# Altium PCB UTOS V1.0.PcbDoc
Units mil, origin at the board's own origin, x right, y up, seen from the top; angles counter-clockwise.
Board outline 1098.1 x 590.55 mil, 2 copper layers (Top Layer, Bottom Layer); 26 components, 29 nets, 113 pads, 34 vias.
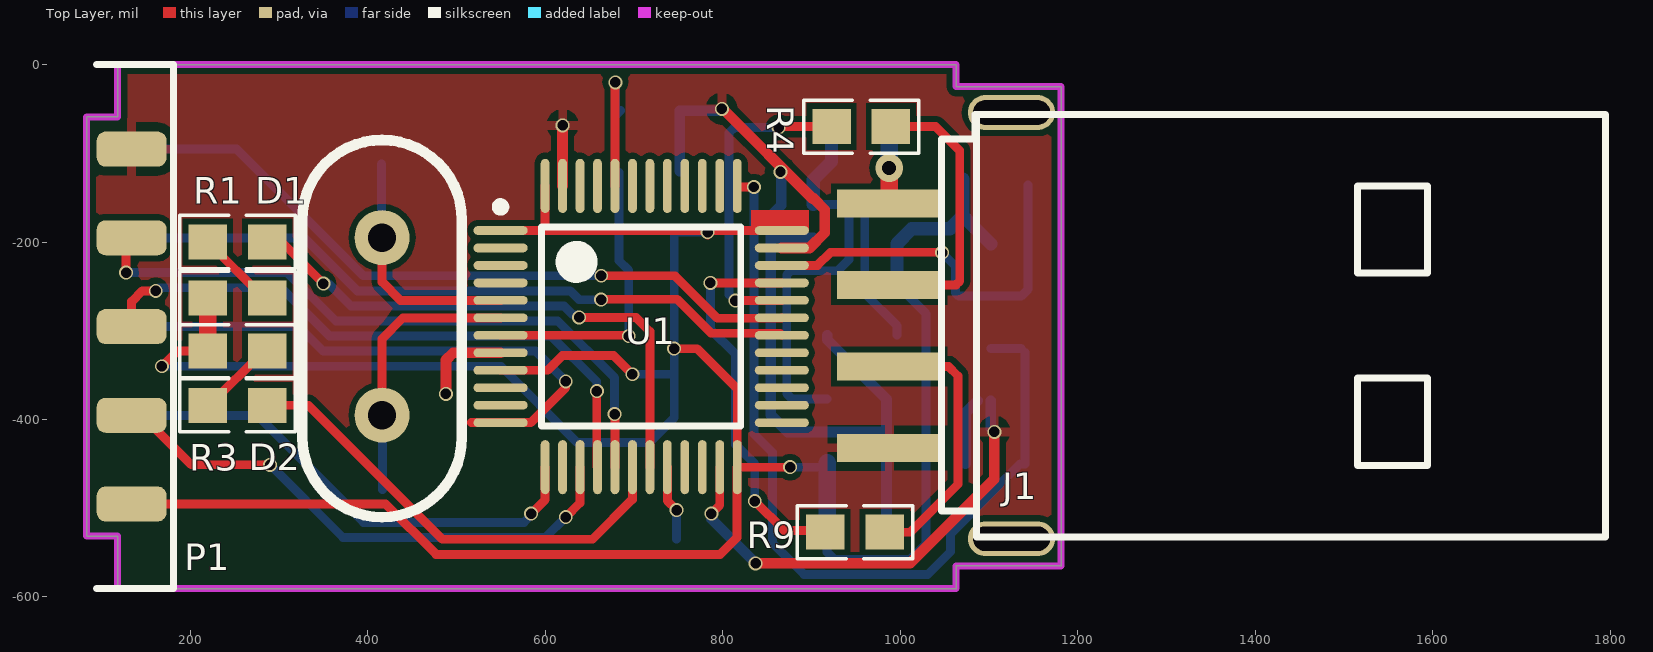
[diagram p0: Top Layer view]
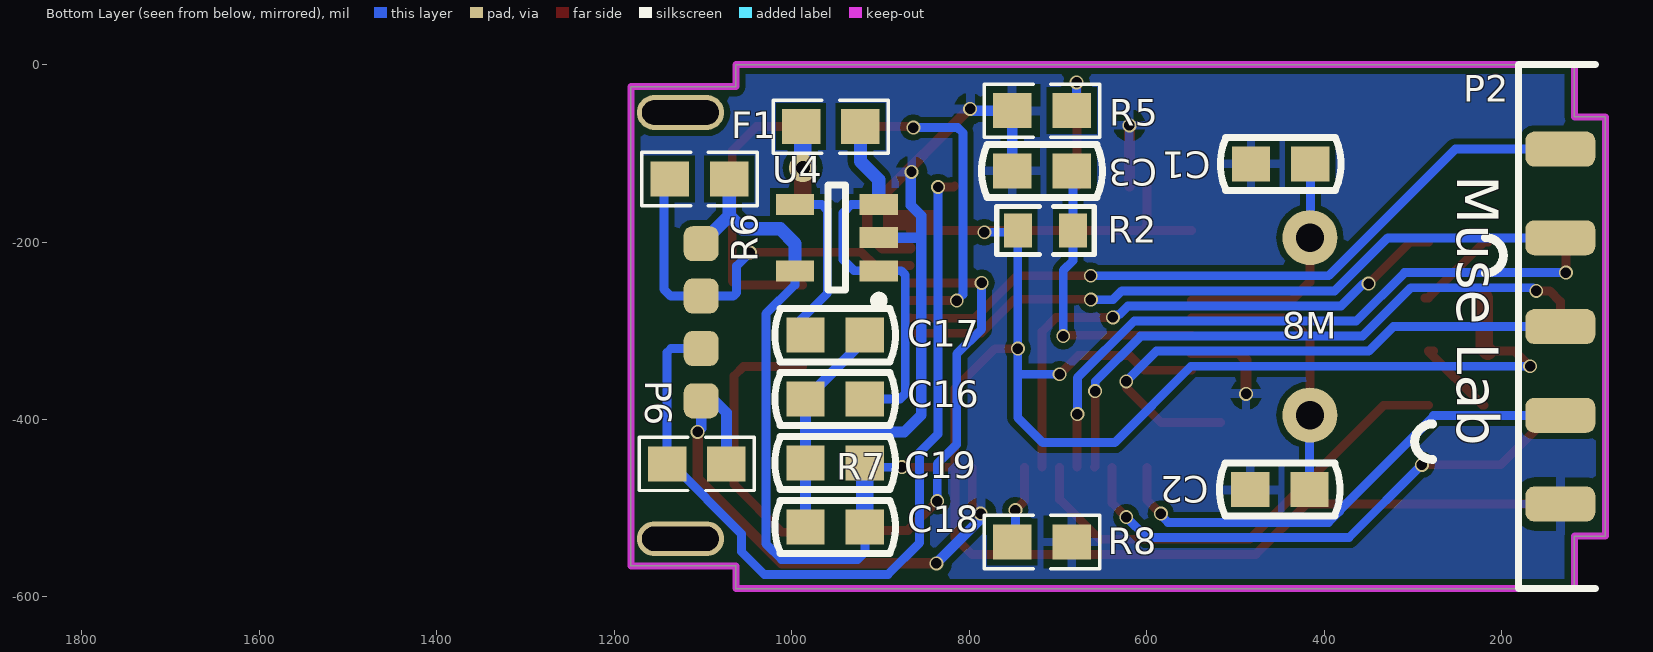
[diagram p1: Bottom Layer view, seen from below]

## Layer stack, top to bottom
Top Solder: solder mask 0.4, Solder Resist, Dk 3.5
Top Layer: signal copper 1.4
Dielectric 1: dielectric 12.6, FR-4, Dk 4.8
Bottom Layer: signal copper 1.4
Bottom Solder: solder mask 0.4, Solder Resist, Dk 3.5

## Board outline
83,-531.5 118.11,-531.5 118.11,-590.55 1062.99,-590.55 1062.99,-565 1181.1,-565 1181.1,-25 1062.99,-25 1062.99,0 118.11,0 118.11,-59.06 83,-59.06

## Design rules (kind name [scope] priority, off if disabled: settings)
Clearance [All] p1: gap=7
ComponentClearance [All] p1: gap=0 collisioncheckmode=3 verticalgap=0 showdistances=FALSE
PolygonConnect [All] p1: connectstyle=Relief reliefconductorwidth=10 reliefentries=4 polygonreliefangle="90 Angle" airgapwidth=10
RoutingVias [All] p1: holewidth=11.81 width=15.75 viastyle="Through Hole" minholewidth=7.87 minwidth=11.81 maxholewidth=11.81 maxwidth=15.75
SilkToBoardRegionClearance [All] p1 off:
SolderMaskExpansion [All] p1: expansion=4
Width GND [InNet('GND')] p1: maxlimit=20 minlimit=10 preferedwidth=12
Width 3V3 [InNet('3V3')] p2: maxlimit=20 minlimit=10 preferedwidth=15
Width 5V [InNet('5V')] p3: maxlimit=20 minlimit=10 preferedwidth=15
Width [All] p4: maxlimit=40 minlimit=6 preferedwidth=6
27 further rules are at their usual default settings.

## Components (designator, comment, footprint, x,y, rotation, side; value= is the part's Value field where it differs from the comment)
8M "XTAL" XTAL 416,-195 r180 bottom
C1 "C0603" C-RAD-0603 449,-112 r0 bottom
C2 "C0603" C-RAD-0603 450,-479 r0 bottom
C3 "C0603" C-RAD-0603 718,-120 r180 bottom
C16 "1uf" C-RAD-0603 951,-377 r180 bottom
C17 "223" C-RAD-0603 951,-305 r0 bottom
C18 "1uf" C-RAD-0603 951,-521 r180 bottom
C19 "104" C-RAD-0603 951,-449 r180 bottom
D1 "D0603" 0603-1 253,-263 r0 top
D2 "D0603" 0603-1 253,-323 r0 top
F1 "FUSE" 0603-1 956,-70 r0 bottom
J1 "USB" USB 1145,-558 r0 top locked
P1 "" p5 94.49,-295.28 r180 top
P2 "" p5 94.49,-295.28 r180 bottom
P6 "Header 4" p4 1102,-379 r270 bottom
R1 "R0603" 0603-1 253,-200 r180 top
R2 "R0603" r0603 683,-187 r0 bottom
R3 "R0603" 0603-1 253,-384 r180 top
R4 "R0805" 0603-1 956,-70 r0 top
R5 "R0603" 0603-1 718,-52 r0 bottom
R6 "R0805" 0603-1 1104,-129 r0 bottom
R7 "R0805" 0603-1 1107,-450 r0 bottom
R8 "R0603" 0603-1 718,-538 r0 bottom
R9 "R0805" 0603-1 949,-527 r0 top
U1 "STM32F103C8T6" LQFP48 708,-295.28 r0 top locked
U4 "RT9193-33" SOT23-5 949,-195 r0 bottom

## Footprints (in the part's own frame and the unit in brackets; to place one, negate y for a bottom-side part, rotate by r counter-clockwise, add the part's x,y. Pads: shape width x height; smd on the part's side, far side on the other; paste and mask are expansions set on the pad)
0603-1 [mm] "贴片带丝印"
  rect 1.1x1 smd: 1(-0.85,0) 2(0.85,0)
  silkscreen extent -1.65,-0.76 1.65,0.76, body extent -1.14,-0.38 1.14,0.38, height 1
C-RAD-0603 [mm] "贴片电容"
  rect 1.1x1 smd: 1(-0.85,0) 2(0.85,0)
  silkscreen extent -1.73,-0.76 1.73,0.76, body extent -1.14,-0.38 1.14,0.38, height 1
LQFP48 [mm] "Thin QFP, 48-Leads, Body 7x7mm, Pitch 0.5mm, IPC High Density"
  oval 1.55x0.25 smd: 1(-4.025,2.75) 2(-4.025,2.25) 3(-4.025,1.75) 4(-4.025,1.25) 5(-4.025,0.75) 6(-4.025,0.25) 7(-4.025,-0.25) 8(-4.025,-0.75) 9(-4.025,-1.25) 10(-4.025,-1.75) 11(-4.025,-2.25) 12(-4.025,-2.75) 25(4.025,-2.75) 26(4.025,-2.25) 27(4.025,-1.75) 28(4.025,-1.25) 29(4.025,-0.75) 30(4.025,-0.25) 31(4.025,0.25) 32(4.025,0.75) 33(4.025,1.25) 34(4.025,1.75) 35(4.025,2.25) 36(4.025,2.75)
  oval 0.25x1.55 smd: 13(-2.75,-4.025) 14(-2.25,-4.025) 15(-1.75,-4.025) 16(-1.25,-4.025) 17(-0.75,-4.025) 18(-0.25,-4.025) 19(0.25,-4.025) 20(0.75,-4.025) 21(1.25,-4.025) 22(1.75,-4.025) 23(2.25,-4.025) 24(2.75,-4.025) 37(2.75,4.025) 38(2.25,4.025) 39(1.75,4.025) 40(1.25,4.025) 41(0.75,4.025) 42(0.25,4.025) 43(-0.25,4.025) 44(-0.75,4.025) 45(-1.25,4.025) 46(-1.75,4.025) 47(-2.25,4.025) 48(-2.75,4.025)
  silkscreen extent -4.15,-2.85 2.85,3.55, body extent -3.5,-3.5 3.5,3.5, height 1.6
p4 [mm]
  rrect50% 1x1 smd: 1(0,0) 2(-1.5,0) 3(-3,0) 4(-4.5,0)
p5 [mm] "贴片牛脚座一侧"
  rrect50% 2x1 smd: 1(-1,5.08) 2(-1,2.54) 3(-1,0) 4(-1,-2.54) 5(-1,-5.08)
  silkscreen extent -2.2,-7.5 0,7.5
r0603 [mm]
  rect 0.8x0.96 smd: 1(0,0) 2(1.58,0)
  silkscreen extent -0.61,-0.69 2.18,0.69
SOT23-5 [mm] "Max4173"
  rect 1.1x0.6 smd: 1(-1.2,0.95) 2(-1.2,0) 3(-1.2,-0.95) 4(1.2,-0.95) 5(1.2,0.95)
  silkscreen extent -1.32,-1.5 0.25,1.92, body extent -0.87,-1.5 0.87,1.5, height 1.45
USB [mm] "USB贴片公头"
  rect 3x0.8 smd: 1(-4,10.2) 2(-4,7.867) 3(-4,5.533) 4(-4,3.2)
  oval 2.5x1 hole 0.7 slot 2.2 at 0 deg: ""(-0.5,0.6) ""(-0.5,12.8)
  silkscreen extent -2.5,0.65 16.5,12.75
XTAL [mil]
  round 62 hole 32: 1(0,0) 2(0,-200)

## Part data
C1 C2 C3: "Capacitor"
C16 C17 C18 C19: library part CAP, "Capacitor"
D1 D2: "Typical RED, GREEN, YELLOW, AMBER GaAs LED"
J1: "USB接口"
P1 P2: library part p5
P6: "Header, 4-Pin"
R1 R2 R3 R4 R5 R6 R7 R8 R9: "Resistor"
U1: "LowPower MCU"

## Via types
v1: diameter 15.75, hole 11.81, Top Layer to Bottom Layer, 33 vias
v2: diameter 31.5, hole 15.75, Top Layer to Bottom Layer, 1 vias

## Nets (pads, with @x,y where several pads share a name; then routed paths per layer and width w, separated by ;. In a path a pad name is that pad's centre, name@x,y a point inside that pad or via, vN(x,y) a via of type N, cw(c..) or ccw(c..) an arc to the next point about the centre after c; other vN are vias at no path point)
3V3: C18.2 C19.2 D1.1 D2.1 P1.1 P6.4 R2.2 R6.1 U1.1 U1.9 U1.24 U1.36 U1.48 U4.5 | length 3396
  Top Layer w10: P1.1 420.23,-495.28 476.96,-552 797,-552 816.12,-532.88 816.12,-453.89 U1.24 ; v1(168,-340) 185,-323 D2.1@215.54,-323 ; U1.9 602.51,-344.49 619,-328 677,-328 v1(697.97,-349) ; U1.1 605.01,-187.01 ; U1.48 599.73,-181.73 605.01,-187.01 ; v1(745.2,-320.2) 771.2,-320.2 816.27,-365.27 U1.24 ; v1@783,-192.01 v1(783,-189) ; U1.36 605.01,-187.01 ; v1(875.74,-453.74) U1.24
  Top Layer w20: D2.1@215.54,-323 219.54,-319 D1.1
  Bottom Layer w10: v1(168,-340) 550,-340 636,-426 717,-426 745.2,-397.8 745.2,-350 ; v1(697.97,-349) 744.2,-349 745.2,-350 ; v1(783,-189) 747.2,-189 R2.2 v1(745.2,-320.2) 745.2,-350 ; v1(875.74,-453.74) 912.8,-453.74 C19.2 ; C18.2 917.54,-549.54 925.61,-557.61 1011.39,-557.61 1029,-540 1029,-281 996.24,-248.24 U4.5
  Bottom Layer w15: U4.5 996.24,-201.76 1013,-185 1055.91,-185 1070.54,-170.37 ; R6.1 1070.54,-170.37 ; P6.4 1070.54,-170.37
  Bottom Layer w20: C18.2 C19.2
5V_USB: F1.2 J1.1 | length 84.5
  Top Layer w20: J1.1 v2(987.52,-116.52)
  Bottom Layer w20: v2(987.52,-116.52) F1.2@987.52,-71.94
BOOT0: R5.1 U1.44 | length 158.4
  Top Layer w10: U1.44 678.47,-20.53 v1(679,-20)
  Bottom Layer w10: v1(679,-20) 679,-53.54 681,-55.54 R5.1
BOOT1: R8.2 U1.20 | length 85.1
  Top Layer w10: U1.20 737.53,-491.53 v1(748,-502)
  Bottom Layer w10: R8.2@748,-534.54 v1(748,-502)
GND: C1.2 C2.2 C3.1 C16.1 C17.1 C18.1 C19.1 J1.4 P1.5 P2.5 P6.1 R5.2 R7.1 R8.1 U1.8 U1.23 U1.35 U1.47 U4.2 | length 1843.5
  Top Layer w10: v1(787,-506) 796.58,-496.42 U1.23
  Top Layer w12: v1(488,-371) 488,-333 496.2,-324.8 U1.8 ; U1.47 v1(619.42,-68.58) ; v1(799,-50) 800,-50 901,-151 902.38,-151 915,-163.62 915,-189.41 897.71,-206.69 U1.35 ; v1(837,-562) 1011,-562 1106,-467 v1(1106,-414)
  Bottom Layer w12: C3.1 R5.2 797,-52 v1(799,-50) ; v1@787,-512 v1(837,-562) ; v1(865,-121) 865.87,-121.87 865.87,-158.52 854,-170.39 854,-193 ; U4.2 856,-195 854,-193 ; C17.1 917.54,-310.07 C16.1 984.46,-414 ; C18.1 C19.1 984.46,-414 ; R7.1 1073.54,-392.46 P6.1@1087,-379 ; P6.1 1102,-410 v1(1106,-414) ; 854,-193 854,-395 873,-414 984.46,-414
I2C1_SCL: U1.42
I2C1_SDA: U1.43
Net8M_1: 8M.1 C1.1 U1.5 | length 275.3
  Top Layer w10: 8M.1 416,-245 436.75,-265.75 U1.5
  Bottom Layer w10: C1.1 415.54,-194.54 8M.1
Net8M_2: 8M.2 C2.1 U1.6 | length 312.8
  Top Layer w10: 8M.2 416,-309 439.57,-285.43 U1.6
  Bottom Layer w10: C2.1 8M.2@416.54,-395.54
NetC16_2: C16.2 F1.1 U4.1 U4.3 | length 462
  Bottom Layer w10: U4.3 932.6,-157.6 942,-167 942,-220 929.6,-232.4 U4.1 876.6,-232.4 872,-237 872,-371 878,-377 C16.2 ; F1.1@915.76,-76.78 F1.1
  Bottom Layer w15: U4.3 901.76,-130 922.54,-109.22 F1.1
NetC17_2: C17.2 U4.4 | length 195
  Bottom Layer w10: U4.4 966.4,-157.6 960,-164 960,-258 996.46,-294.46 C17.2@996.46,-305
NetD1_2: D1.2 R1.2 | length 97
  Top Layer w10: R1.2@215.54,-200 R1.2 R1.2 ; R1.2 282.54,-263 D1.2
NetD2_2: D2.2 R3.2 | length 94.1
  Top Layer w10: R3.2 221.46,-384 282.46,-323 D2.2@276.54,-323
NetJ1_2: J1.2 R4.2 | length 317
  Top Layer w10: J1.2 1062.71,-248.29 1067,-244 1067,-97 1040,-70 R4.2
NetJ1_3: J1.3 R9.2 | length 308.9
  Top Layer w10: R9.2 1011,-527 1065,-473 1065,-351 1054.15,-340.15 J1.3
NetR1_1: R1.1 U1.19 | length 631
  Top Layer w10: R1.1@282.46,-200 R1.1 303,-200 v1(350,-247) ; v1(638,-285) 702,-285 717.84,-300.84 U1.19
  Bottom Layer w10: v1@350,-248 v1(350,-247) 355.96,-247 380.96,-272 620.96,-272 630.96,-282 635,-282 v1(638,-285)
NetR3_1: R3.1 U1.18 | length 533.1
  Top Layer w10: R3.1@282.46,-384 R3.1 333,-384 484,-535 653.16,-535 698.16,-490 U1.18
NRST: C3.2 R2.1 U1.7 | length 333.9
  Top Layer w10: U1.7 693.12,-305.12 v1(694,-306)
  Bottom Layer w10: C3.2@683,-121.54 R2.1 683,-221 694,-232 v1(694,-306)
SPI1_MISO: P1.3 U1.16 | length 699.4
  Top Layer w10: P1.3 133.86,-267.14 146,-255 v1(161,-255) ; v1(658,-368) 658,-452.95 U1.16
  Bottom Layer w10: v1(161,-255) 164.49,-251.51 302.36,-251.51 356.85,-306 606.85,-306 658,-357.15 v1(658,-368)
SPI1_MOSI: P1.4 U1.17 | length 742.3
  Top Layer w10: v1(127.51,-234.51) 127.51,-201.62 P1.4 ; v1(678,-394) 678.47,-394.47 U1.17
  Bottom Layer w10: v1(127.51,-234.51) 309.41,-234.51 363.89,-289 613.89,-289 678,-353.11 v1(678,-394)
SPI1_SCK: P1.2 U1.15 | length 618.6
  Top Layer w10: P1.2 145.28,-395.28 201,-451 v1(290,-451) ; v1(623,-510) 639.1,-493.9 U1.15
  Bottom Layer w10: v1(290,-451) 372,-533 600,-533 v1(623,-510)
SWCLK: P6.2 R7.2 U1.37 | length 957.4
  Top Layer w10: U1.37 817.46,-138 v1(835,-138)
  Bottom Layer w10: v1(835,-138) 835,-416.13 855.87,-437 855.87,-538.87 891.61,-574.61 1030.84,-574.61 1056.68,-548.78 1056.68,-528.68 1135.36,-450 R7.2 1140.46,-324.46 1135.94,-319.94 P6.2
SWDIO: P6.3 R6.2 U1.34 | length 442.5
  Top Layer w10: U1.34 906.62,-226.38 921.5,-211.5 1046.5,-211.5 v1(1047,-212)
  Bottom Layer w10: v1(1047,-212) 1062,-227 1062,-257 1065.89,-260.89 P6.3 1136.11,-260.89 1144,-253 R6.2@1144,-135.54
UART1_RX: P2.1 U1.31 | length 811.7
  Top Layer w10: v1(663,-238) 746,-238 793.87,-285.87 866.02,-285.87 U1.31
  Bottom Layer w10: P2.1 252.32,-95.28 395.04,-238 v1(663,-238)
UART1_TX: P2.2 U1.30 | length 779.5
  Top Layer w10: v1(662.96,-265) 662.48,-264.52 748.48,-264.52 786.83,-302.87 864.22,-302.87 U1.30
  Bottom Layer w10: P2.2 328.28,-195.28 388,-255 628,-255 638,-265 v1(662.96,-265)
UART2_RX: P2.4 U1.13 | length 563.4
  Top Layer w10: v1(584,-506) 599.73,-490.27 U1.13
  Bottom Layer w10: P2.4 277,-395.28 ; 277,-397 382.88,-502.88 382.88,-503.66 395.23,-516 576,-516 v1@585,-507
UART2_TX: P2.3 U1.12 | length 644.5
  Top Layer w10: 516.54,-403.54 U1.12 583.46,-403.54 623,-364 v1(623,-357)
  Bottom Layer w10: P2.3 322.09,-295.28 349.81,-323 589,-323 v1(623,-357)
USBDM: R4.1 U1.32 | length 362.9
  Top Layer w10: v1(814,-266) 814.25,-265.75 U1.32 ; v1(863,-71) 864,-70 R4.1
  Bottom Layer w10: v1(814,-266) 807,-259 807,-77 813,-71 v1(863,-71)
USBDP: R9.1 U1.33 | length 441
  Top Layer w10: v1(786.06,-246.06) U1.33 ; v1(835.99,-491.96) 869.04,-525 913.54,-525 R9.1
  Bottom Layer w10: v1(786.06,-246.06) 786.06,-298.06 814,-326 814,-428 835.99,-449.99 v1(835.99,-491.96)
pads on no net: J1. U1.2 U1.3 U1.4 U1.10 U1.11 U1.14 U1.21 U1.22 U1.25 U1.26 U1.27 U1.28 U1.29 U1.38 U1.39 U1.40 U1.41 U1.45 U1.46

## Polygon pours and split planes (outlines as drawn)
GND on Top Layer "Bottom Layer-No Net" (solid, pour order 4): 83,-59.06 83,-59.05 118.11,-59.05 118.11,0 119.1,-0.99 1062.99,-0.99 1062.99,-25 1181.1,-25 1181.1,-565 1062.99,-565 1062.99,-588.56 1061,-590.55 1061.01,-590.54 1062.99,-590.54 118.12,-590.54 118.11,-590.55 118,-590.44 118,-531.5 83,-531.5
GND on Bottom Layer "Bottom Layer-No Net" (solid, pour order 6): 118.11,-0.11 118.22,0 1062.99,0 1062.99,-25 1181.1,-25 1181.1,-565 1062.99,-565 1062.99,-590.55 1062.88,-590.44 118.11,-590.44 118.11,-531.61 118,-531.5 83,-531.5 83,-59.06 118.11,-59.06

## Keep-outs
Keep-Out Layer:
  lines w7.87: 118.11,-590.55 1062.99,-590.55 1062.99,-565 1181.1,-565 1181.1,-25 1062.99,-25 1062.99,-0.99 ; 118.11,-590.44 118.11,-531.5 83,-531.5 83,-59.06 118.11,-59.06 118.11,-0.11 ; 118.11,0 1062.99,0

## Other copper
Top Layer:
  rectangle net 3V3: 832,-187.01 897,-164

## Silkscreen, mask and mechanical layers (free items; w line width, h text height)
Bottom Overlay:
  lines w10: 218,-235 cw(c218,-215) 198,-215 cw(c218,-215) 218,-195 ; 278,-445 ccw(c278,-425) 298,-425 ccw(c278,-425) 278,-405
  text "Muse Lab" at 265,-125 h80 r90